# Altium PCB Right_gloves_V3.PcbDoc
Units mm, origin at the board's own origin, x right, y up, seen from the top; angles counter-clockwise.
Board outline 32.4 x 39.7 mm, 2 copper layers (Top Layer, Bottom Layer); 46 components, 34 nets, 269 pads, 270 vias.
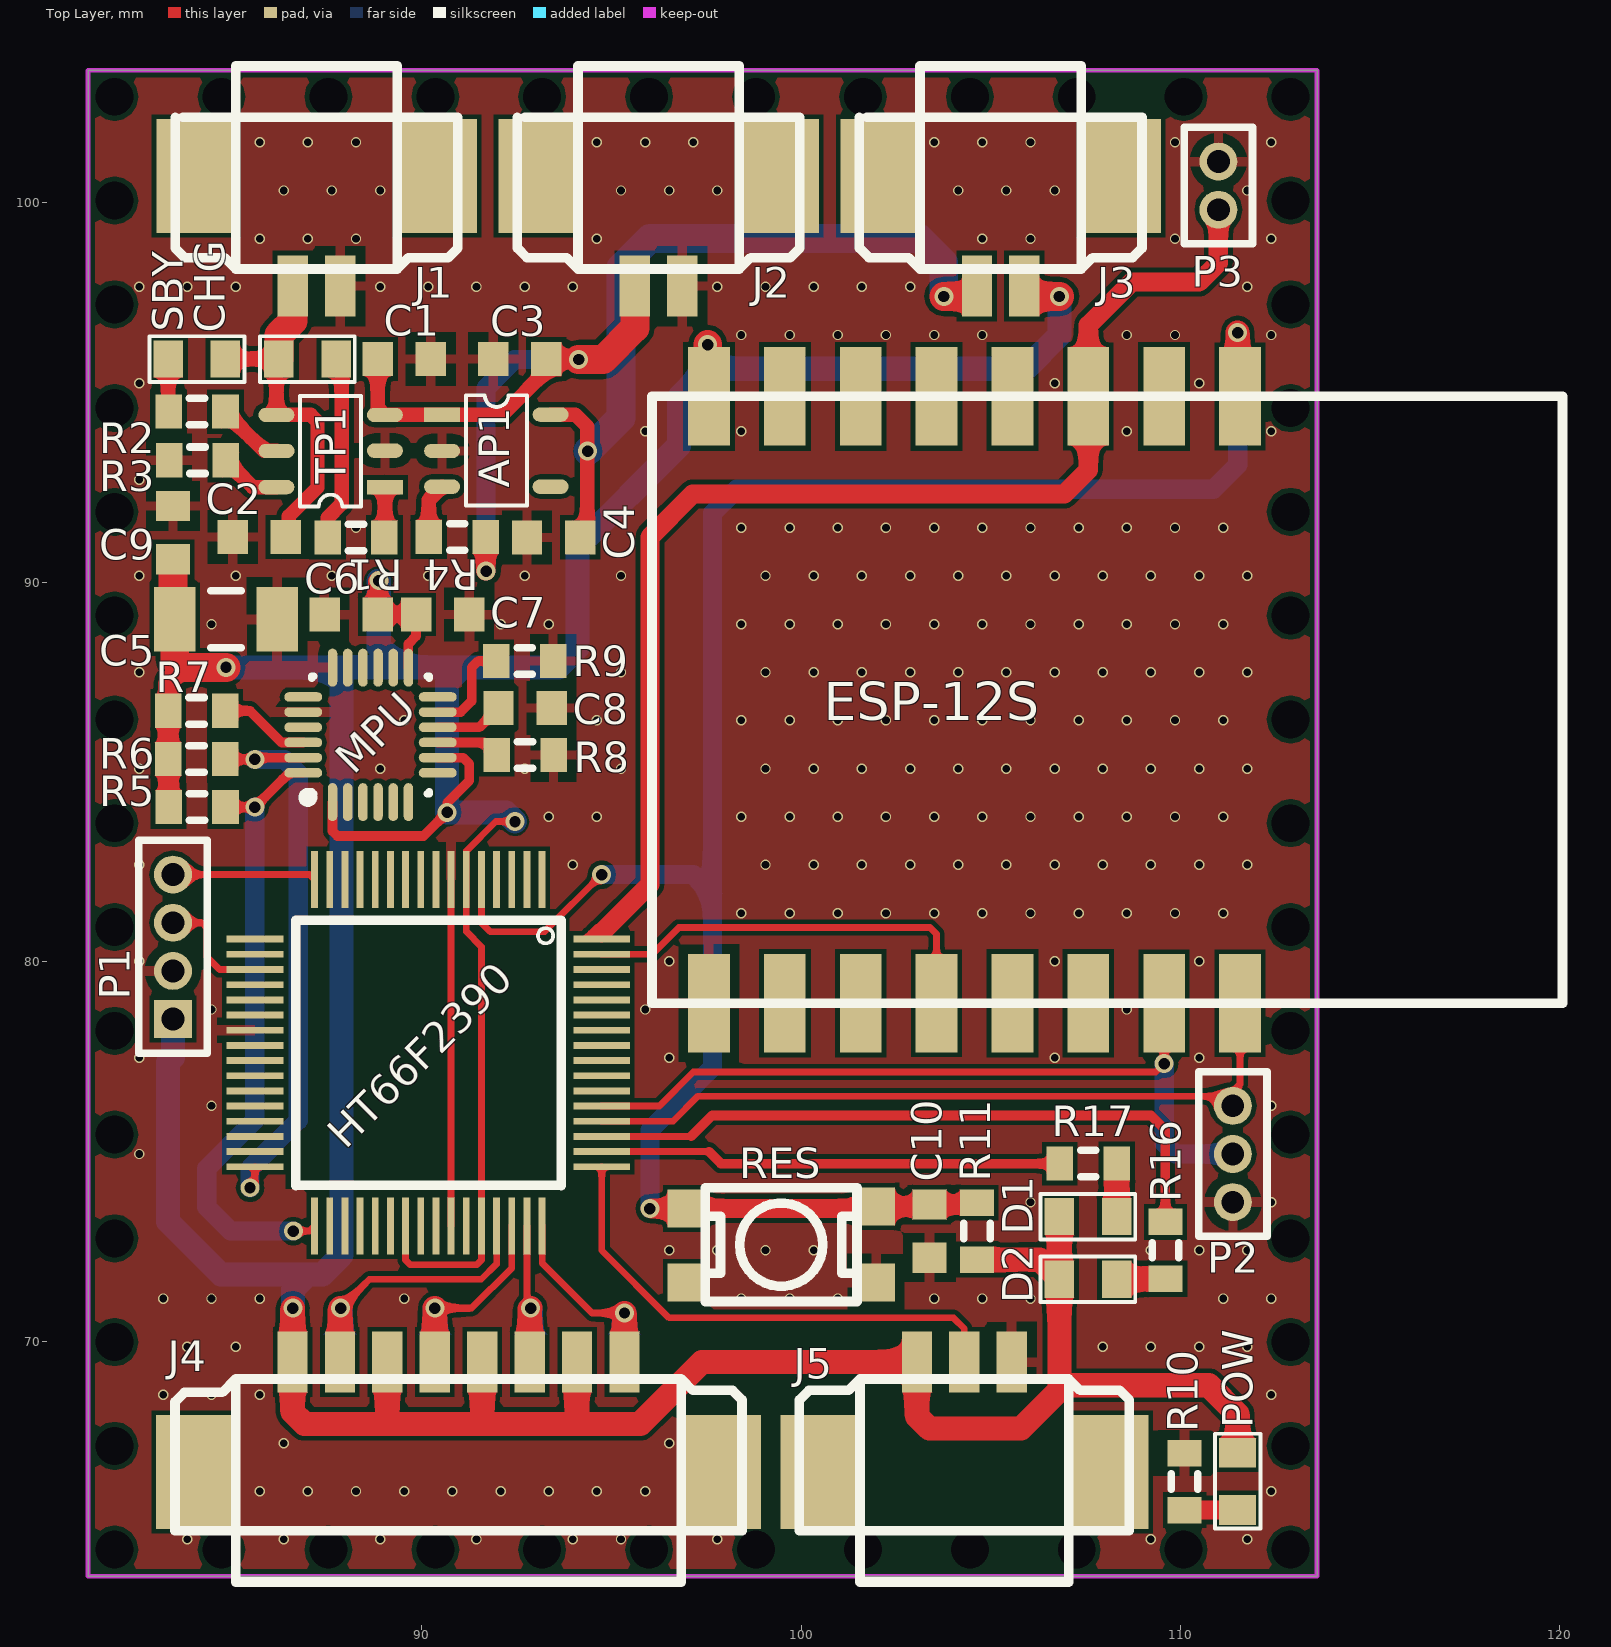
[diagram p0: Top Layer view]
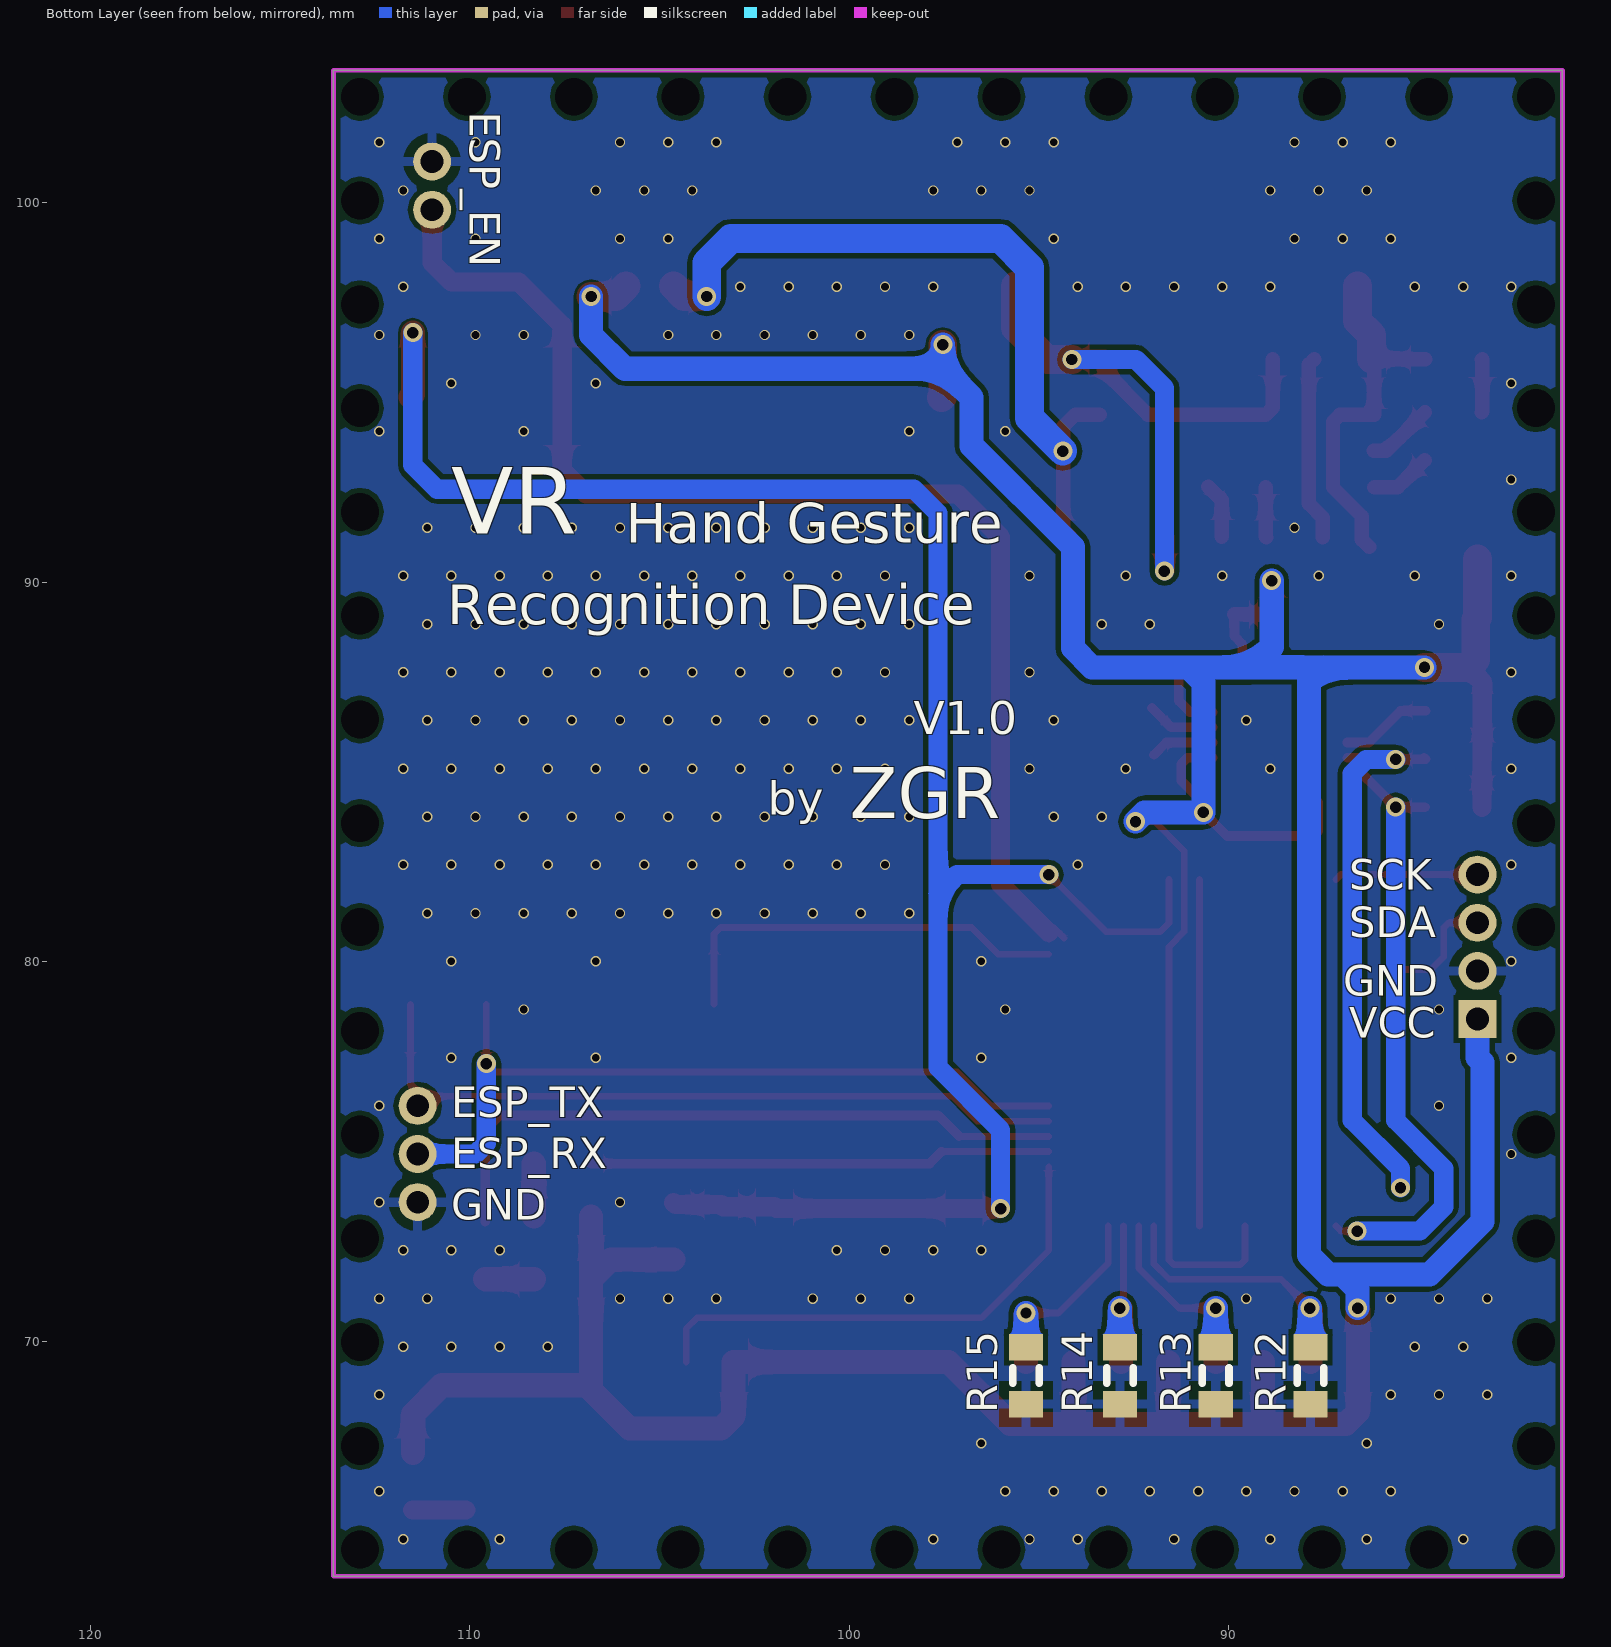
[diagram p1: Bottom Layer view, seen from below]

## Layer stack, top to bottom
Top Solder: solder mask 0.0102, Solder Resist, Dk 3.5
Top Layer: signal copper 0.0356
Dielectric 1: dielectric 0.32, FR-4, Dk 4.8
Bottom Layer: signal copper 0.0356
Bottom Solder: solder mask 0.0102, Solder Resist, Dk 3.5

## Board outline
81.2,63.8 81.2,103.5 113.6,103.5 113.6,63.8

## Design rules (kind name [scope] priority, off if disabled: settings)
Clearance [All] p1: gap=0.127 ignorepadtopadclearanceinfootprint=FALSE
PolygonConnect [All] p1: connectstyle=Relief reliefconductorwidth=0.254 reliefentries=4 polygonreliefangle="90 Angle" airgapwidth=0.254
RoutingVias [All] p1: holewidth=0.711 width=1.27 viastyle="Through Hole" minholewidth=0.2 minwidth=0.225 maxholewidth=0.711 maxwidth=1.27
SolderMaskExpansion [All] p1: expansion=0.102
Width [All] p1: maxlimit=1.016 minlimit=0.178 preferedwidth=0.254
30 further rules are at their usual default settings.

## Components (designator, comment, footprint, x,y, rotation, side; value= is the part's Value field where it differs from the comment)
AP1 "AP2112" SOT-23-5 91.165,94.933 r0 top
C1 "Cap Semi" 1608[0603] 89.535,95.885 r180 top value=1uf
C2 "Cap Semi" 1608[0603] 85.715,91.198 r0 top value=10uF
C3 "Cap Semi" 1608[0603] 92.583,95.885 r0 top value=1uf
C4 "Cap Semi" 1608[0603] 93.472,91.186 r0 top value=1uf
C5 "Cap Semi" C1206 84.836,89.027 r180 top value=10uF
C6 "Cap Semi" 1608[0603] 88.138,89.154 r0 top value=0.01uF
C7 "Cap Semi" 1608[0603] 90.551,89.154 r180 top value=0.1uF
C8 "Cap Semi" 1608[0603] 92.722,86.687 r180 top value=0.1uF
C9 "Cap Semi" 1608[0603] 83.439,91.313 r270 top value=0.1uf
C10 "Cap Semi" 1608[0603] 103.378,72.898 r90 top value=0.1uf
CHG "LED" SMD-0603 86.233,95.885 r0 top value=Red
D1 "LED" SMD-0603 106.807,71.628 r0 top (schematic designator SYS1)
D2 "LED" SMD-0603 106.807,73.279 r0 top (schematic designator SYS2)
ESP-12S "ESP-12S" ESP-12S 96.069,94.902 r270 top
HT66F2390 "HT66F2390_64" HLQFP-64(7mm*7mm) 93.172,82.164 r270 top
J1 "Head_2" Terminal_block_2pin_1.25mm_SMD 87.249,100.711 r0 top
J2 "Head_2" Terminal_block_2pin_1.25mm_SMD 96.266,100.711 r0 top
J3 "Head_2" Terminal_block_2pin_1.25mm_SMD 105.283,100.711 r0 top
J4 "Head_8" Terminal_block_8pin_1.25mm_SMD 94.691,66.548 r180 top
J5 "Head_3" Terminal_block_3pin_1.25mm_SMD 104.902,66.548 r180 top
MPU "MPU-9250" "QFN_24PIN _2" 88.646,85.979 r90 top (schematic designator MPU9250)
P1 "MHDR1X4" MHDR1X4 83.439,82.296 r270 top
P2 "MHDR1X3" MHDR1X3 111.379,76.2 r270 top
P3 "MHDR1X2" MHDR1X2 110.998,99.822 r90 top
POW "LED" SMD-0603 111.506,67.056 r270 top
R1 "Res3" J1-0603 88.265,91.186 r0 top value=330
R2 "Res3" J1-0603 84.074,94.5 r180 top value=330
R3 "Res3" J1-0603 84.086,93.218 r0 top value=1.66K
R4 "Res3" J1-0603 90.932,91.198 r0 top value=100k
R5 "Res3" J1-0603 84.074,84.074 r180 top value=10K
R6 "Res3" J1-0603 84.062,85.344 r180 top value=10K
R7 "Res3" J1-0603 84.062,86.614 r180 top value=10K
R8 "Res3" J1-0603 92.722,85.452 r180 top value=10K
R9 "Res3" J1-0603 92.71,87.923 r180 top value=10K
R10 "Res3" J1-0603 110.109,66.294 r270 top value=330
R11 "Res3" J1-0603 104.633,72.898 r90 top value=1K
R12 "Res3" J1-0603 87.841,69.088 r90 bottom value=10K
R13 "Res3" J1-0603 90.341,69.088 r90 bottom value=10K
R14 "Res3" J1-0603 92.868,69.088 r90 bottom value=10K
R15 "Res3" J1-0603 95.341,69.088 r90 bottom value=10K
R16 "Res3" J1-0603 109.601,72.39 r270 top value=330
R17 "Res3" J1-0603 107.569,74.676 r0 top value=330
RES "SW_Button" "TACK-SW_SMD 2P 4x3mm_2" 101.473,74.041 r270 top
SBY "LED" SMD-0603 84.822,95.885 r180 top value=Green
TP1 "" SOT-23-6 88.397,92.002 r180 top

## Footprints (in the part's own frame and the unit in brackets; to place one, negate y for a bottom-side part, rotate by r counter-clockwise, add the part's x,y. Pads: shape width x height; smd on the part's side, far side on the other; paste and mask are expansions set on the pad)
1608[0603] [mm] "Chip Capacitor, Body 1.6x0.8mm, IPC High Density"
  rect 0.8x0.9 smd: 1(-0.7,0) 2(0.7,0)
  body extent -0.87,-0.48 0.87,0.48, height 1.3
C1206 [mm] "Chip Capacitor, Body 3.2x1.6mm, IPC High Density"
  rect 1.1x1.7 smd: 1(-1.35,0) 2(1.35,0)
  silkscreen extent -0.4,-0.75 0.4,0.75, body extent -1.7,-0.9 1.7,0.9, height 1.3
ESP-12S [mm]
  rect 2.6x1.1 smd: 1(0,15.5) 2(0,13.5) 3(0,11.5) 4(0,9.5) 5(0,7.5) 6(0,5.5) 7(0,3.5) 8(0,1.5) 9(16,1.5) 10(16,3.5) 11(16,5.5) 12(16,7.5) 13(16,9.5) 14(16,11.5) 15(16,13.5) 16(16,15.5)
  silkscreen extent 0,0 16,24
HLQFP-64(7mm*7mm) [mm] "HLQFP64(7mm*7mm)"
  rect 1.5x0.18 smd: 1(0,0) 2(0,-0.4) 3(0,-0.8) 4(0,-1.2) 5(0,-1.6) 6(0,-2) 7(0,-2.4) 8(0,-2.8) 9(0,-3.2) 10(0,-3.6) 11(0,-4) 12(0,-4.4) 13(0,-4.8) 14(0,-5.2) 15(0,-5.6) 16(0,-6) 33(9.13,-6) 34(9.13,-5.6) 35(9.13,-5.2) 36(9.13,-4.8) 37(9.13,-4.4) 38(9.13,-4) 39(9.13,-3.6) 40(9.13,-3.2) 41(9.13,-2.8) 42(9.13,-2.4) 43(9.13,-2) 44(9.13,-1.6) 45(9.13,-1.2) 46(9.13,-0.8) 47(9.13,-0.4) 48(9.13,0)
  rect 0.18x1.5 smd: 17(1.57,-7.57) 18(1.97,-7.57) 19(2.37,-7.57) 20(2.77,-7.57) 21(3.17,-7.57) 22(3.57,-7.57) 23(3.97,-7.57) 24(4.37,-7.57) 25(4.77,-7.57) 26(5.17,-7.57) 27(5.57,-7.57) 28(5.97,-7.57) 29(6.37,-7.57) 30(6.77,-7.57) 31(7.17,-7.57) 32(7.57,-7.57) 49(7.57,1.57) 50(7.17,1.57) 51(6.77,1.57) 52(6.37,1.57) 53(5.97,1.57) 54(5.57,1.57) 55(5.17,1.57) 56(4.77,1.57) 57(4.37,1.57) 58(3.97,1.57) 59(3.57,1.57) 60(3.17,1.57) 61(2.77,1.57) 62(2.37,1.57) 63(1.97,1.57) 64(1.57,1.57)
  silkscreen extent 1.07,-6.5 8.07,0.5
J1-0603 [mm] "Chip Resistor, Body 1.6x0.8mm, IPC High Density"
  rect 0.7x0.9 smd: 1(-0.75,0) 2(0.75,0)
  silkscreen extent -0.2,-0.35 0.2,0.35, body extent -0.85,-0.48 0.85,0.48, height 0.9
MHDR1X2 [mm] "Connector; Header; 2 Position"
  round 1 hole 0.6: 1(0,0) 2(1.27,0)
  silkscreen extent -0.9,-0.9 2.17,0.9
MHDR1X3 [mm] "Connector; Header; 3 Position"
  round 1 hole 0.6: 1(0,0) 2(1.27,0) 3(2.54,0)
  silkscreen extent -0.9,-0.9 3.44,0.9
MHDR1X4 [mm] "Connector; Header; 4 Position"
  round 1 hole 0.6: 1(0,0) 2(1.27,0) 3(2.54,0)
  rect 1x1 hole 0.6: 4(3.81,0)
  silkscreen extent -0.9,-0.9 4.71,0.9
"QFN_24PIN _2" [mm]
  oval 1x0.249 smd: 1(-1.772,1) 2(-1.772,0.6) 3(-1.772,0.2) 4(-1.772,-0.2) 5(-1.772,-0.6) 6(-1.772,-1) 13(1.772,-1) 14(1.772,-0.6) 15(1.772,-0.2) 16(1.772,0.2) 17(1.772,0.6) 18(1.772,1)
  oval 0.249x1 smd: 7(-1,-1.772) 8(-0.6,-1.772) 9(-0.2,-1.772) 10(0.2,-1.772) 11(0.6,-1.772) 12(1,-1.772) 19(1,1.772) 20(0.6,1.772) 21(0.2,1.772) 22(-0.2,1.772) 23(-0.6,1.772) 24(-1,1.772)
  silkscreen extent -1.77,-1.55 1.55,1.78, body extent -1.55,-1.55 1.55,1.55, height 1
SMD-0603 [mm]
  rect 0.78x0.98 smd: 1(0,0) 2(1.51,0)
  silkscreen extent -0.5,-0.6 2,0.6
SOT-23-5 [mm]
  rect 0.95x0.38 smd: 1(-0.63,-0.51)
  oval 0.95x0.38 smd: 2(-0.63,-1.47) 3(-0.63,-2.41) 4(2.23,-2.41) 5(2.23,-0.51)
  silkscreen extent 0,-2.91 1.61,0
SOT-23-6 [mm]
  rect 0.95x0.38 smd: 1(-0.63,-0.51)
  oval 0.95x0.38 smd: 2(-0.63,-1.47) 3(-0.63,-2.41) 4(2.23,-2.41) 5(2.227,-1.461) 6(2.23,-0.51)
  silkscreen extent 0,-2.91 1.61,0
"TACK-SW_SMD 2P 4x3mm_2" [mm]
  rect 1x1 smd: 1(0.5,0.5) 1(0.55,-4.5) 2(2.5,0.5) 2(2.5,-4.5)
  silkscreen extent 0,-4 3,0
Terminal_block_2pin_1.25mm_SMD [mm]
  rect 0.8x1.6 smd: 1(-0.65,-2.9) 2(0.6,-2.9)
  rect 2.1x3 smd: ""(-3.2,0) ""(3.15,0)
  silkscreen extent -3.75,-2.45 3.7,2.9
Terminal_block_3pin_1.25mm_SMD [mm]
  rect 0.8x1.6 smd: 1(-0.65,-2.9) 2(0.6,-2.9) 3(1.85,-2.9)
  rect 2.1x3 smd: ""(-3.2,0) ""(4.4,0)
  silkscreen extent -3.75,-2.45 4.95,2.9
Terminal_block_8pin_1.25mm_SMD [mm]
  rect 0.8x1.6 smd: 1(-0.65,-2.9) 2(0.6,-2.9) 3(1.85,-2.9) 4(3.1,-2.9) 5(4.35,-2.9) 6(5.6,-2.9) 7(6.85,-2.9) 8(8.1,-2.9)
  rect 2.1x3 smd: ""(-3.2,0) ""(10.65,0)
  silkscreen extent -3.75,-2.45 11.2,2.9

## Part data
C1 C2 C3 C4 C5 C6 C7 C8 C9 C10: "Capacitor (Semiconductor SIM Model)", LatestRevisionDate=29-May-2009, LatestRevisionNote="IPC-7351 Footprint Added.", PackageDescription="Chip Capacitor", PackageReference=C1206, Published=8-Jun-2000, Publisher="Altium Limited"
P1: "Header, 4-Pin", LatestRevisionDate=17-Jul-2002, LatestRevisionNote="Re-released for DXP Platform.", Publisher="Altium Limited"
P2: "Header, 3-Pin", LatestRevisionDate=17-Jul-2002, LatestRevisionNote="Re-released for DXP Platform.", Publisher="Altium Limited"
P3: "Header, 2-Pin", LatestRevisionDate=17-Jul-2002, LatestRevisionNote="Re-released for DXP Platform.", Publisher="Altium Limited"
R1 R2 R3 R4 R5 R6 R7 R8 R9 R10 R11 R12 R13 R14 R15 R16 R17: "Resistor", LatestRevisionDate=29-May-2009, LatestRevisionNote="IPC-7351 Footprint Added.", PackageDescription="Chip Resistor", PackageReference=J1-0603, Published=8-Jun-2000, Publisher="Altium Limited"
TP1: library part TP-4057

## Free pads (board coordinates)
  round 0 hole 1: 0(81.9,64.5) 0(81.9,67.236) 0(81.9,69.971) 0(81.9,72.707) 0(81.9,75.443) 0(81.9,78.179) 0(81.9,80.914) 0(81.9,83.65) 0(81.9,86.386) 0(81.9,89.121) 0(81.9,91.857) 0(81.9,94.593) 0(81.9,97.329) 0(81.9,100.064) 0(81.9,102.8) 0(84.718,64.5) 0(84.718,102.8) 0(87.536,64.5) 0(87.536,102.8) 0(90.355,64.5) 0(90.355,102.8) 0(93.173,64.5) 0(93.173,102.8) 0(95.991,64.5) 0(95.991,102.8) 0(98.809,64.5) 0(98.809,102.8) 0(101.627,64.5) 0(101.627,102.8) 0(104.445,64.5) 0(104.445,102.8) 0(107.264,64.5) 0(107.264,102.8) 0(110.082,64.5) 0(110.082,102.8) 0(112.9,64.5) 0(112.9,102.8) 0(112.9,67.236) 0(112.9,69.971) 0(112.9,72.707) 0(112.9,75.443) 0(112.9,78.179) 0(112.9,80.914) 0(112.9,83.65) 0(112.9,86.386) 0(112.9,89.121) 0(112.9,91.857) 0(112.9,94.593) 0(112.9,97.329) 0(112.9,100.064)

## Via types
v1: diameter 0.275, hole 0.2, Top Layer to Bottom Layer, tented both sides, 247 vias
v2: diameter 0.5, hole 0.3, Top Layer to Bottom Layer, tented both sides, 23 vias

## Nets (pads, with @x,y where several pads share a name; then routed paths per layer and width w, separated by ;. In a path a pad name is that pad's centre, name@x,y a point inside that pad or via, vN(x,y) a via of type N, cw(c..) or ccw(c..) an arc to the next point about the centre after c; other vN are vias at no path point)
3.3V: AP1.5 C4.2 J3.1 | length 20.3
  Top Layer w0.381: AP1.5 94.045,94.423 94.361,94.107 94.361,91.375 C4.2
  Top Layer w0.762: v2(103.759,97.536) 104.358,97.536 J3.1
  Bottom Layer w0.762: v2(94.373,93.46) 95.25,94.337 95.25,98.298 96.012,99.06 103.124,99.06 103.759,98.425 v2(103.759,97.536)
EPS_FLASH_MODE: ESP-12S.12 HT66F2390.63 | length 11
  Top Layer w0.178: HT66F2390.63 96.069,80.194 96.774,80.899 103.397,80.899 103.569,80.727 ESP-12S.12@103.569,78.888
ESP_EN: ESP-12S.3 HT66F2390.64 P3.1 | length 33.1
  Top Layer w0.178: HT66F2390.64@94.339,80.615 94.488,80.772 94.615,80.899 ; HT66F2390.64 94.742,80.772
  Top Layer w0.508: 94.742,80.772 96.012,82.042 96.012,91.198 97.143,92.329 106.934,92.329 107.569,92.964 107.569,94.869 107.569,96.774 108.712,97.917 110.49,97.917 110.998,98.425 P3.1
ESP_RX: ESP-12S.15 HT66F2390.53 P2.2 | length 20.9
  Top Layer w0.178: HT66F2390.53 96.26,76.194 97.155,77.089 109.347,77.089 v2(109.569,77.311) ESP-12S.15@109.569,78.869
  Bottom Layer w0.508: v2(109.569,77.311) 109.569,75.216 109.855,74.93 P2.2
ESP_TX: ESP-12S.16 HT66F2390.52 P2.1 | length 19.3
  Top Layer w0.178: HT66F2390.52 96.622,75.794 97.282,76.454 111.252,76.454 111.569,76.771 ESP-12S.16@111.569,78.869
FLEX1: HT66F2390.45 J4.7 R12.2 | length 8.1
  Top Layer w0.178: v2(87.858,70.866) 88.62,71.628 91.567,71.628 91.972,72.033 HT66F2390.45
  Top Layer w0.635: J4.7 87.841,70.849 v2(87.858,70.866)
  Bottom Layer w0.635: R12.2 87.858,69.855 v2(87.858,70.866)
FLEX2: HT66F2390.46 J4.5 R13.2 | length 6
  Top Layer w0.178: v2(90.341,70.866) 91.313,70.866 92.372,71.925 HT66F2390.46
  Top Layer w0.635: J4.5 v2(90.341,70.866)
  Bottom Layer w0.635: R13.2 v2(90.341,70.866)
FLEX3: HT66F2390.47 J4.3 R14.2 | length 4.7
  Top Layer w0.178: HT66F2390.47 92.772,70.962 v2(92.868,70.866)
  Top Layer w0.635: J4.3 92.841,70.839 v2(92.868,70.866)
  Bottom Layer w0.635: R14.2 v2(92.868,70.866)
FLEX4: HT66F2390.48 J4.1 R15.2 | length 5.9
  Top Layer w0.178: HT66F2390.48 93.172,72.055 94.488,70.739 v2(95.341,70.739)
  Top Layer w0.635: J4.1 v2(95.341,70.739)
  Bottom Layer w0.635: R15.2 v2(95.341,70.739)
GND: AP1.2 C1.1 C2.1 C3.1 C4.1 C5.1 C6.1 C7.1 C8.1 C9.1 C10.1 ESP-12S.9 HT66F2390.7 HT66F2390.23 HT66F2390.42 J1.2 J2.2 J5.1 MPU.18 MPU.20 P1.3 P2.3 P3.2 R3.1 R8.1 R9.1 R10.1 R12.1 R13.1 R14.1 R15.1 RES.2@101.973,71.541 TP1.2 | length 9.1
  Top Layer w0.178: HT66F2390.42 HT66F2390.7
  other v1: 83.82,64.77 86.36,64.77 88.9,64.77 91.44,64.77 93.98,64.77 95.25,64.77 97.79,64.77 109.22,64.77 111.76,64.77 85.725,66.04 86.995,66.04 88.265,66.04 89.535,66.04 90.805,66.04 92.075,66.04 93.345,66.04 94.615,66.04 95.885,66.04 112.395,66.04 86.36,67.31 96.52,67.31 83.185,68.58 84.455,68.58 85.725,68.58 112.395,68.58 83.82,69.85 85.09,69.85 107.95,69.85 109.22,69.85 110.49,69.85 111.76,69.85 83.185,71.12 84.455,71.12 85.725,71.12 89.535,71.12 98.425,71.12 99.695,71.12 100.965,71.12 103.505,71.12 104.775,71.12 106.045,71.12 111.125,71.12 112.395,71.12 96.52,72.39 97.79,72.39 99.06,72.39 100.33,72.39 109.22,72.39 110.49,72.39 111.76,72.39 106.045,73.66 112.395,73.66 82.55,74.93 84.455,76.2 112.395,76.2 82.55,77.47 96.52,77.47 106.68,77.47 110.49,77.47 84.455,78.74 95.885,78.74 108.585,78.74 82.55,80.01 96.52,80.01 106.68,80.01 110.49,80.01 98.425,81.28 99.695,81.28 100.965,81.28 102.235,81.28 103.505,81.28 104.775,81.28 106.045,81.28 107.315,81.28 108.585,81.28 109.855,81.28 111.125,81.28 82.55,82.55 93.98,82.55 99.06,82.55 100.33,82.55 101.6,82.55 102.87,82.55 104.14,82.55 105.41,82.55 106.68,82.55 107.95,82.55 109.22,82.55 110.49,82.55 111.76,82.55 93.345,83.82 94.615,83.82 98.425,83.82 99.695,83.82 100.965,83.82 102.235,83.82 103.505,83.82 104.775,83.82 106.045,83.82 107.315,83.82 108.585,83.82 109.855,83.82 111.125,83.82 82.55,85.09 88.9,85.09 92.71,85.09 95.25,85.09 99.06,85.09 100.33,85.09 101.6,85.09 102.87,85.09 104.14,85.09 105.41,85.09 106.68,85.09 107.95,85.09 109.22,85.09 110.49,85.09 111.76,85.09 89.535,86.36 94.615,86.36 98.425,86.36 99.695,86.36 100.965,86.36 102.235,86.36 103.505,86.36 104.775,86.36 106.045,86.36 107.315,86.36 108.585,86.36 109.855,86.36 111.125,86.36 82.55,87.63 95.25,87.63 99.06,87.63 100.33,87.63 101.6,87.63 102.87,87.63 104.14,87.63 105.41,87.63 106.68,87.63 107.95,87.63 109.22,87.63 110.49,87.63 111.76,87.63 84.455,88.9 92.075,88.9 93.345,88.9 98.425,88.9 99.695,88.9 100.965,88.9 102.235,88.9 103.505,88.9 104.775,88.9 106.045,88.9 107.315,88.9 108.585,88.9 109.855,88.9 111.125,88.9 82.55,90.17 85.09,90.17 87.63,90.17 90.17,90.17 92.71,90.17 95.25,90.17 99.06,90.17 100.33,90.17 101.6,90.17 102.87,90.17 104.14,90.17 105.41,90.17 106.68,90.17 107.95,90.17 109.22,90.17 110.49,90.17 111.76,90.17 88.265,91.44 98.425,91.44 99.695,91.44 100.965,91.44 102.235,91.44 103.505,91.44 104.775,91.44 106.045,91.44 107.315,91.44 108.585,91.44 109.855,91.44 111.125,91.44 82.55,92.71 95.885,93.98 98.425,93.98 108.585,93.98 112.395,93.98 82.55,95.25 106.68,95.25 110.49,95.25 98.425,96.52 99.695,96.52 100.965,96.52 102.235,96.52 103.505,96.52 104.775,96.52 108.585,96.52 109.855,96.52 112.395,96.52 82.55,97.79 83.82,97.79 85.09,97.79 88.9,97.79 90.17,97.79 91.44,97.79 92.71,97.79 93.98,97.79 97.79,97.79 99.06,97.79 100.33,97.79 101.6,97.79 102.87,97.79 111.76,97.79 85.725,99.06 86.995,99.06 88.265,99.06 94.615,99.06 104.775,99.06 106.045,99.06 109.855,99.06 112.395,99.06 86.36,100.33 87.63,100.33 88.9,100.33 95.25,100.33 96.52,100.33 97.79,100.33 104.14,100.33 105.41,100.33 106.68,100.33 111.76,100.33 85.725,101.6 86.995,101.6 88.265,101.6 94.615,101.6 95.885,101.6 97.155,101.6 103.505,101.6 104.775,101.6 106.045,101.6 109.855,101.6 112.395,101.6
MPU_SCL: HT66F2390.32 MPU.23 R6.1 | length 15.5
  Top Layer w0.178: v2(85.471,74.041) 85.602,74.172 HT66F2390.32
  Top Layer w0.254: R6.1@84.847,85.379 R6.1 84.824,85.332 v2(85.598,85.332) 85.645,85.379 MPU.23
  Bottom Layer w0.508: v2(85.471,74.041) 85.471,74.549 86.741,75.819 86.741,84.963 86.372,85.332 v2(85.598,85.332)
MPU_SDA: HT66F2390.33 MPU.24 R5.1 | length 16.7
  Top Layer w0.178: v2(86.614,72.898) 87.036,72.898 HT66F2390.33
  Top Layer w0.254: R5.1 v2(85.598,84.074) 86.503,84.979 MPU.24
  Bottom Layer w0.508: v2(85.598,84.074) 85.598,75.819 84.328,74.549 84.328,73.533 84.963,72.898 v2(86.614,72.898)
NetAP1_3: AP1.3 R4.1 | length 1.5
  Top Layer w0.381: R4.1 90.182,92.17 AP1.3
NetC8_2: C8.2 MPU.10 | length 1.8
  Top Layer w0.254: MPU.10 91.514,86.179 C8.2
NetCHG_2: CHG.2 R1.1 | length 4.9
  Top Layer w0.381: R1.1 87.515,91.706 87.884,92.075 87.884,95.744 CHG.2
NetMPU9250_9: MPU.9 R8.2 | length 1.7
  Top Layer w0.254: MPU.9 91.645,85.779 R8.2
NetMPU9250_11: MPU.11 R9.2 | length 2.6
  Top Layer w0.254: MPU.11 91.024,86.579 91.313,86.868 91.313,87.757 91.479,87.923 R9.2
NetMPU9250_22: MPU.22 R7.1 | length 2.4
  Top Layer w0.254: R7.1 85.471,86.614 86.306,85.779 MPU.22
NetPOW_2: POW.2 R10.2 | length 1.4
  Top Layer w0.508: R10.2 111.504,65.544 POW.2
NetR1_2: R1.2 TP1.1 | length 1.3
  Top Layer w0.381: R1.2 89.027,91.198 TP1.1
NetR2_1: R2.1 TP1.5 | length 1.8
  Top Layer w0.381: R2.1@84.824,94.488 85.849,93.463 TP1.5
NetR2_2: R2.2 SBY.2 | length 1.4
  Top Layer w0.381: R2.2@83.324,94.488 83.312,94.5 SBY.2 SBY.2@83.324,95.873
NetR3_2: R3.2 TP1.6 | length 1.6
  Top Layer w0.381: R3.2 85.542,92.512 TP1.6
NetR16_2: D1.2 R16.2 | length 1.3
  Top Layer w0.635: D1.2 109.589,71.628 R16.2
NetR17_2: D2.2 R17.2 | length 1.4
  Top Layer w0.635: D2.2 108.319,73.281 R17.2
RES: C10.2 ESP-12S.1 HT66F2390.5 R11.2 RES.1 | length 55.4
  Top Layer w0.178: HT66F2390.5 91.572,81.021 91.802,80.791 93.237,80.791 v2(94.742,82.296)
  Top Layer w0.508: v2(96.012,73.491) 96.973,73.491 101.923,73.491 101.973,73.541 103.321,73.541 C10.2 104.583,73.598 R11.2
  Top Layer w0.635: v2(111.506,96.582) 111.506,94.951 ESP-12S.1@111.569,94.888
  Bottom Layer w0.508: v2(94.742,82.296) 97.155,82.296 97.663,81.788 ; v2(96.012,73.491) 96.012,75.565 97.663,77.216 97.663,81.788 ; v2(111.506,96.582) 111.506,93.091 110.871,92.456 98.298,92.456 97.663,91.821 97.663,81.788
SCK_Burn: HT66F2390.16 P1.1 | length 3.8
  Top Layer w0.178: P1.1 87.04,82.296 HT66F2390.16
SDA_Burn: HT66F2390.19 P1.2 | length 3.1
  Top Layer w0.178: P1.2 84.201,81.026 84.328,80.899 84.328,80.137 84.671,79.794 HT66F2390.19
SYS_LED1: HT66F2390.51 R16.1 | length 17.7
  Top Layer w0.178: HT66F2390.51 97.099,75.394
  Top Layer w0.254: 97.099,75.394 97.651,75.946 109.22,75.946 109.601,75.565 R16.1
SYS_LED2: HT66F2390.50 R17.1 | length 12.2
  Top Layer w0.178: HT66F2390.50 97.569,74.994
  Top Layer w0.254: 97.569,74.994 97.887,74.676 R17.1
touch: HT66F2390.49 J5.2 | length 13.5
  Top Layer w0.178: HT66F2390.49 94.742,72.39 96.52,70.612 104.013,70.612 104.302,70.323 J5.2
USB5V: C2.2 CHG.1 J1.1 SBY.1 TP1.4 | length 9.8
  Top Layer w0.381: SBY.1 CHG.1 86.167,95.819 TP1.4 87.071,94.412 87.249,94.234 87.249,92.5 86.486,91.737 86.486,91.126 C2.2@86.292,90.932
  Top Layer w0.762: CHG.1 86.233,96.52 86.599,96.886 J1.1
VCC: AP1.1 C1.2 C3.2 J2.1 R4.2 TP1.3 | length 18.9
  Top Layer w0.381: C1.2 88.835,94.604 TP1.3 89.038,94.423 AP1.1 92.13,94.423 93.283,95.576 C3.2
  Top Layer w0.508: R4.2 91.682,90.309 v2(91.694,90.297) ; C3.2 94.12,95.885 v2(94.132,95.873)
  Top Layer w0.762: v2(94.132,95.873) 94.78,95.873 95.616,96.709 J2.1
  Bottom Layer w0.508: v2(91.694,90.297) 91.694,95.123 92.444,95.873 v2(94.132,95.873)
VDD: C5.2 C6.2 C7.2 C9.2 D1.1 D2.1 ESP-12S.8 HT66F2390.6 HT66F2390.39 HT66F2390.44 J3.2 J4.2 J4.4 J4.6 J4.8 J5.3 MPU.1 MPU.8 MPU.13 P1.4 POW.1 R5.2 R6.2 R7.2 R11.1 | length 145.2
  Top Layer w0.178: HT66F2390.39 89.572,72.136 89.699,72.009 91.445,72.009 91.572,72.136 HT66F2390.44 91.572,80.391 91.172,80.791 HT66F2390.6 91.172,82.917 91.948,83.693 v2(92.456,83.693)
  Top Layer w0.254: MPU.1 87.646,83.439 87.773,83.312 90.043,83.312 v2(90.666,83.935) 90.666,84.189 91.251,84.774 91.251,85.217 91.089,85.379 MPU.8 ; MPU.13 89.646,88.376 89.851,88.581 C7.2
  Top Layer w0.381: C6.2 C7.2
  Top Layer w0.508: R5.2 83.324,85.332 R6.2 R7.2 83.312,87.376 83.693,87.757 ; C6.2 88.838,90.016 v2(88.865,90.043)
  Top Layer w0.635: v2(86.599,70.866) 86.591,70.858 J4.8 86.591,68.133 86.906,67.818 89.001,67.818 ; J4.6 89.091,67.908 89.001,67.818 ; J4.4 91.591,67.93 91.479,67.818 ; J4.2 94.091,68.02 93.889,67.818 ; R11.1 106.287,72.148 106.299,72.136 ; 106.045,72.136 106.299,72.136 ; 106.807,68.707 105.791,67.691 103.378,67.691 103.052,68.017 J5.3 97.388,69.448 95.758,67.818 93.889,67.818 ; D2.1 D1.1 ; POW.1 111.506,68.072 110.744,68.834 106.807,68.834 D1.1 ; 89.001,67.818 91.479,67.818 ; 91.479,67.818 93.889,67.818 ; 106.299,72.136 D1.1
  Top Layer w0.762: C9.2 83.439,89.074 C5.2 83.486,87.964 83.693,87.757 v2(84.836,87.757) ; v2(97.536,96.266) 97.536,94.902 ESP-12S.8@97.569,94.869 ; J3.2 106.158,97.536 v2(106.807,97.536)
  Bottom Layer w0.635: P1.4 83.439,77.47 83.312,77.343 83.312,73.152 84.709,71.755 86.995,71.755 ; v2(84.836,87.757) 87.503,87.757 ; v2(86.599,70.866) 86.599,71.359 86.995,71.755 ; v2(88.865,90.043) 88.865,88.3 89.408,87.757 ; v2(92.456,83.693) 92.214,83.935 v2(90.666,83.935) 90.666,87.364 91.059,87.757 ; v2(97.536,96.266) 97.536,95.631 ; v2(106.807,97.536) 106.807,96.52 105.918,95.631 97.536,95.631 ; 86.995,71.755 87.376,71.755 87.884,72.263 87.884,87.376 87.503,87.757 ; 87.503,87.757 89.408,87.757 ; 89.408,87.757 91.059,87.757 ; 91.059,87.757 93.599,87.757 94.107,88.265 94.107,90.932 96.774,93.599 96.774,94.869 97.536,95.631
pads on no net: AP1.4 ESP-12S.2 ESP-12S.4 ESP-12S.5 ESP-12S.6 ESP-12S.7 ESP-12S.10 ESP-12S.11 ESP-12S.13 ESP-12S.14 HT66F2390.1 HT66F2390.2 HT66F2390.3 HT66F2390.4 HT66F2390.8 HT66F2390.9 HT66F2390.10 HT66F2390.11 HT66F2390.12 HT66F2390.13 HT66F2390.14 HT66F2390.15 HT66F2390.17 HT66F2390.18 HT66F2390.20 HT66F2390.21 HT66F2390.22 HT66F2390.24 HT66F2390.25 HT66F2390.26 HT66F2390.27 HT66F2390.28 HT66F2390.29 HT66F2390.30 HT66F2390.31 HT66F2390.34 HT66F2390.35 HT66F2390.36 HT66F2390.37 HT66F2390.38 HT66F2390.40 HT66F2390.41 HT66F2390.43 HT66F2390.54 HT66F2390.55 HT66F2390.56 HT66F2390.57 HT66F2390.58 HT66F2390.59 HT66F2390.60 HT66F2390.61 HT66F2390.62 J1. J2. J3. J4. J5. MPU.2 MPU.3 MPU.4 MPU.5 MPU.6 MPU.7 MPU.12 MPU.14 MPU.15 MPU.16 MPU.17 MPU.19 MPU.21 RES.2@96.973,71.541

## Polygon pours and split planes (outlines as drawn)
GND on Top Layer "GND_L01_P018" (solid, remove dead copper, pour order 18): 81.2,103.5 113.6,103.5 113.6,63.8 81.2,63.8
GND on Bottom Layer "GND_L02_P020" (solid, remove dead copper, pour order 20): 81.2,103.5 113.6,103.5 113.6,63.8 81.2,63.8

## Keep-outs
Keep-Out Layer:
  the board outline again, w0.127

## Other copper
Top Layer:
  pour cut-out: 86.4,81.4 93.9,81.4 93.9,73.911 93.889,73.9 93.789,74 86.4,74

## Silkscreen, mask and mechanical layers (free items; w line width, h text height)
Bottom Overlay:
  text "ESP_EN" at 110,102.4 h0.8 r90
  text "Hand Gesture" at 105.9,90.7 h1.8
  text "VR" at 110.5,90.7 h3
  text "Recognition Device" at 110.6,88.556 h1.8
  text "V1.0" at 98.3,85.7 h1.5
  text "by" at 102.144,83.581 h1.5
  text "ZGR" at 99.985,83.327 h2.3
  text "SCK" at 86.826,81.9 h0.8
  text "SDA" at 86.826,80.644 h0.8
  text "GND" at 86.976,79.106 h0.8
  text "VCC" at 86.826,78 h0.8
  text "ESP_TX" at 110.5,75.9 h0.8
  text "ESP_RX" at 110.5,74.55 h0.8
  text "GND" at 110.5,73.2 h0.8